# Altium PCB Driver Morpheus v7.0.PcbDoc
Units mm, origin at the board's own origin, x right, y up, seen from the top; angles counter-clockwise.
Board outline 39.62 x 39.62 mm, 2 copper layers (Top Layer, Bottom Layer); 50 components, 26 nets, 148 pads, 19 vias.
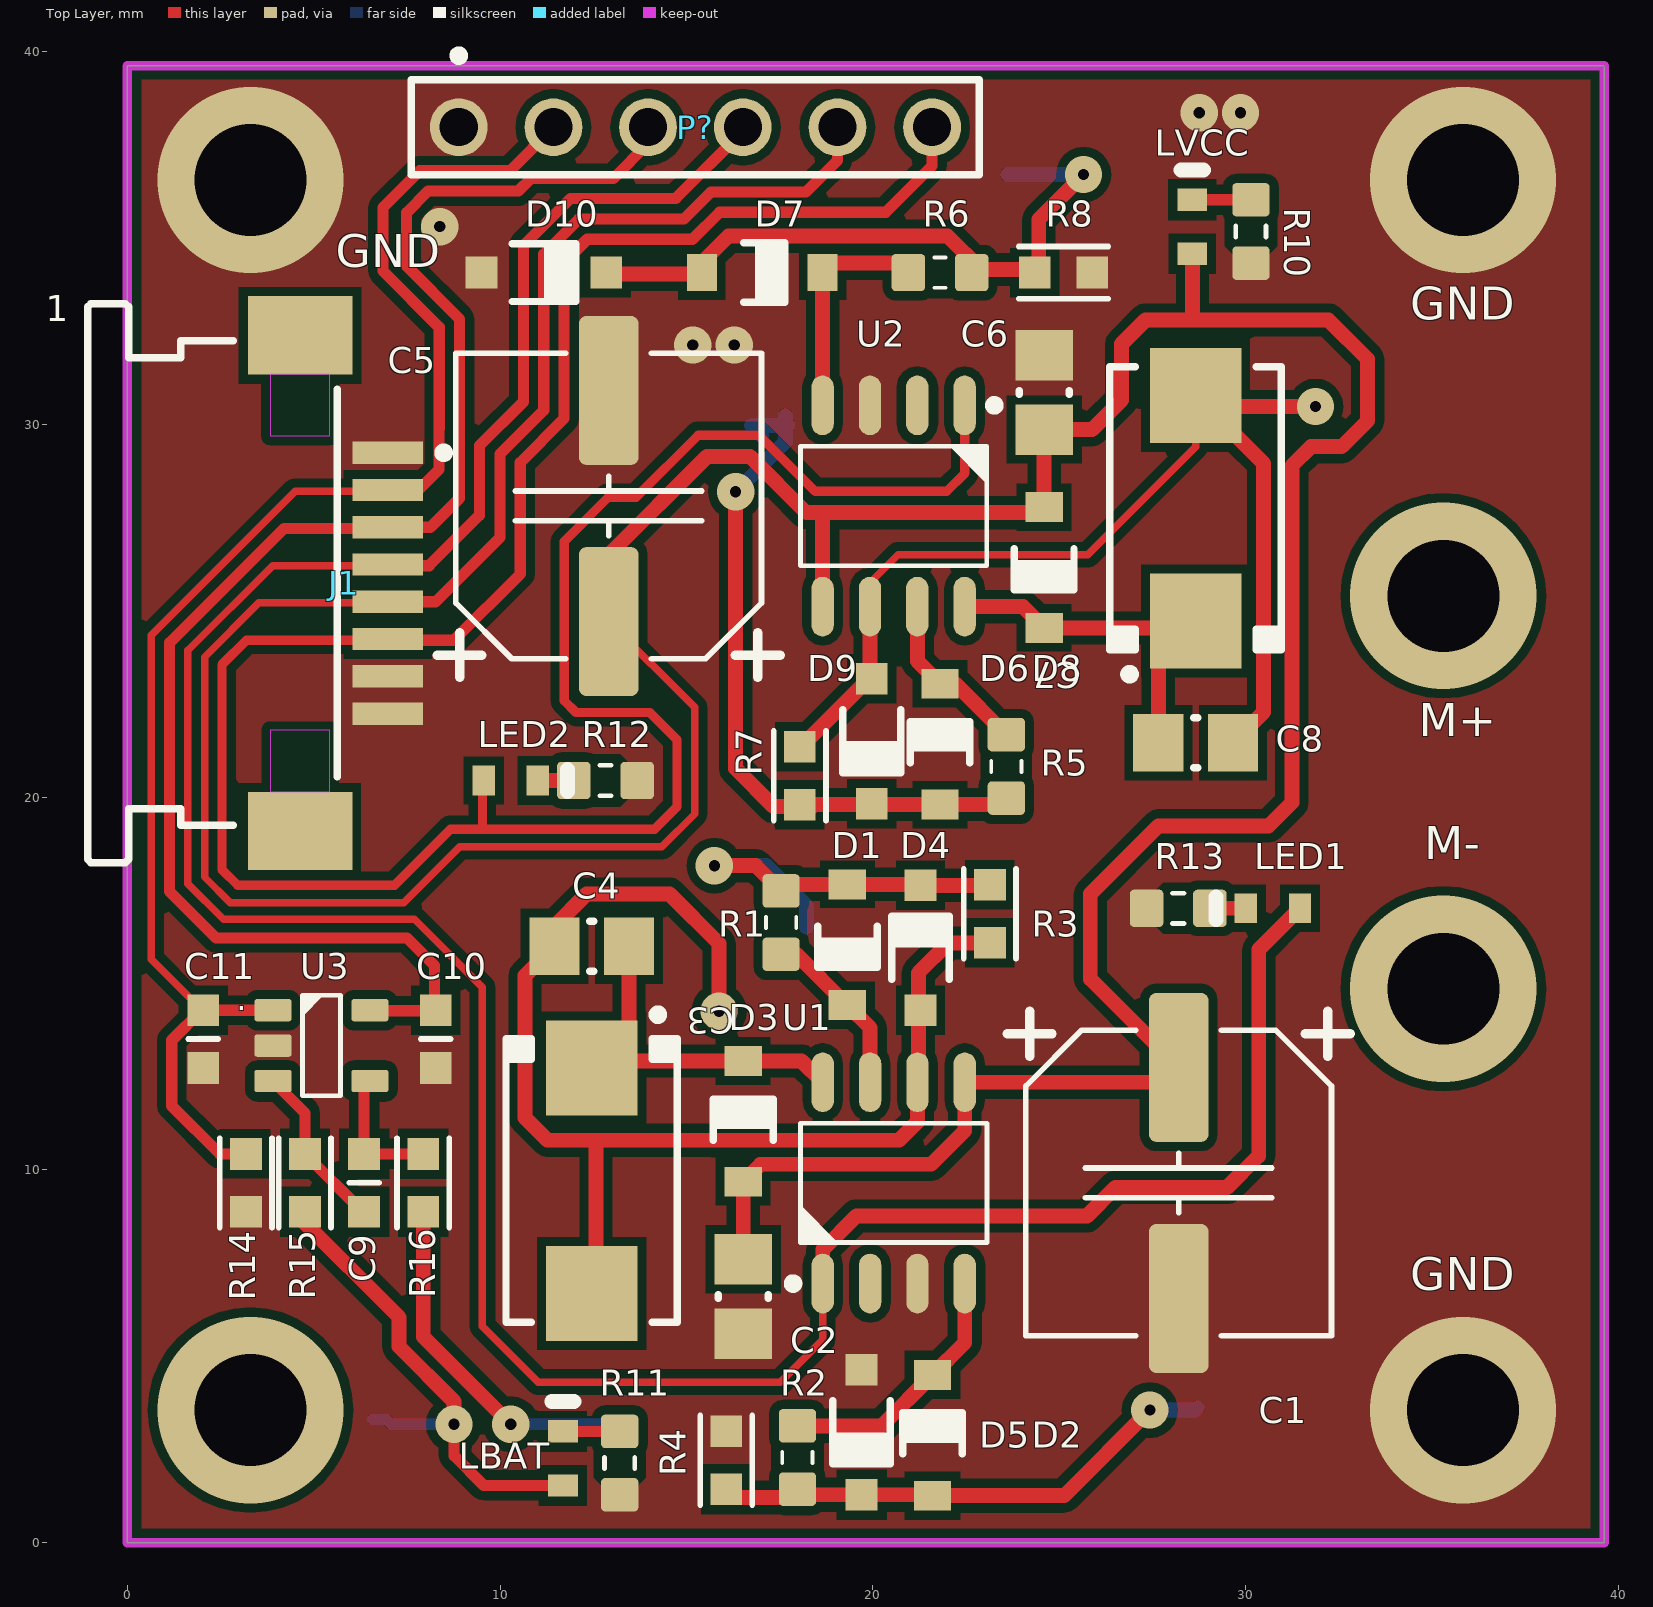
[diagram p0: Top Layer view]
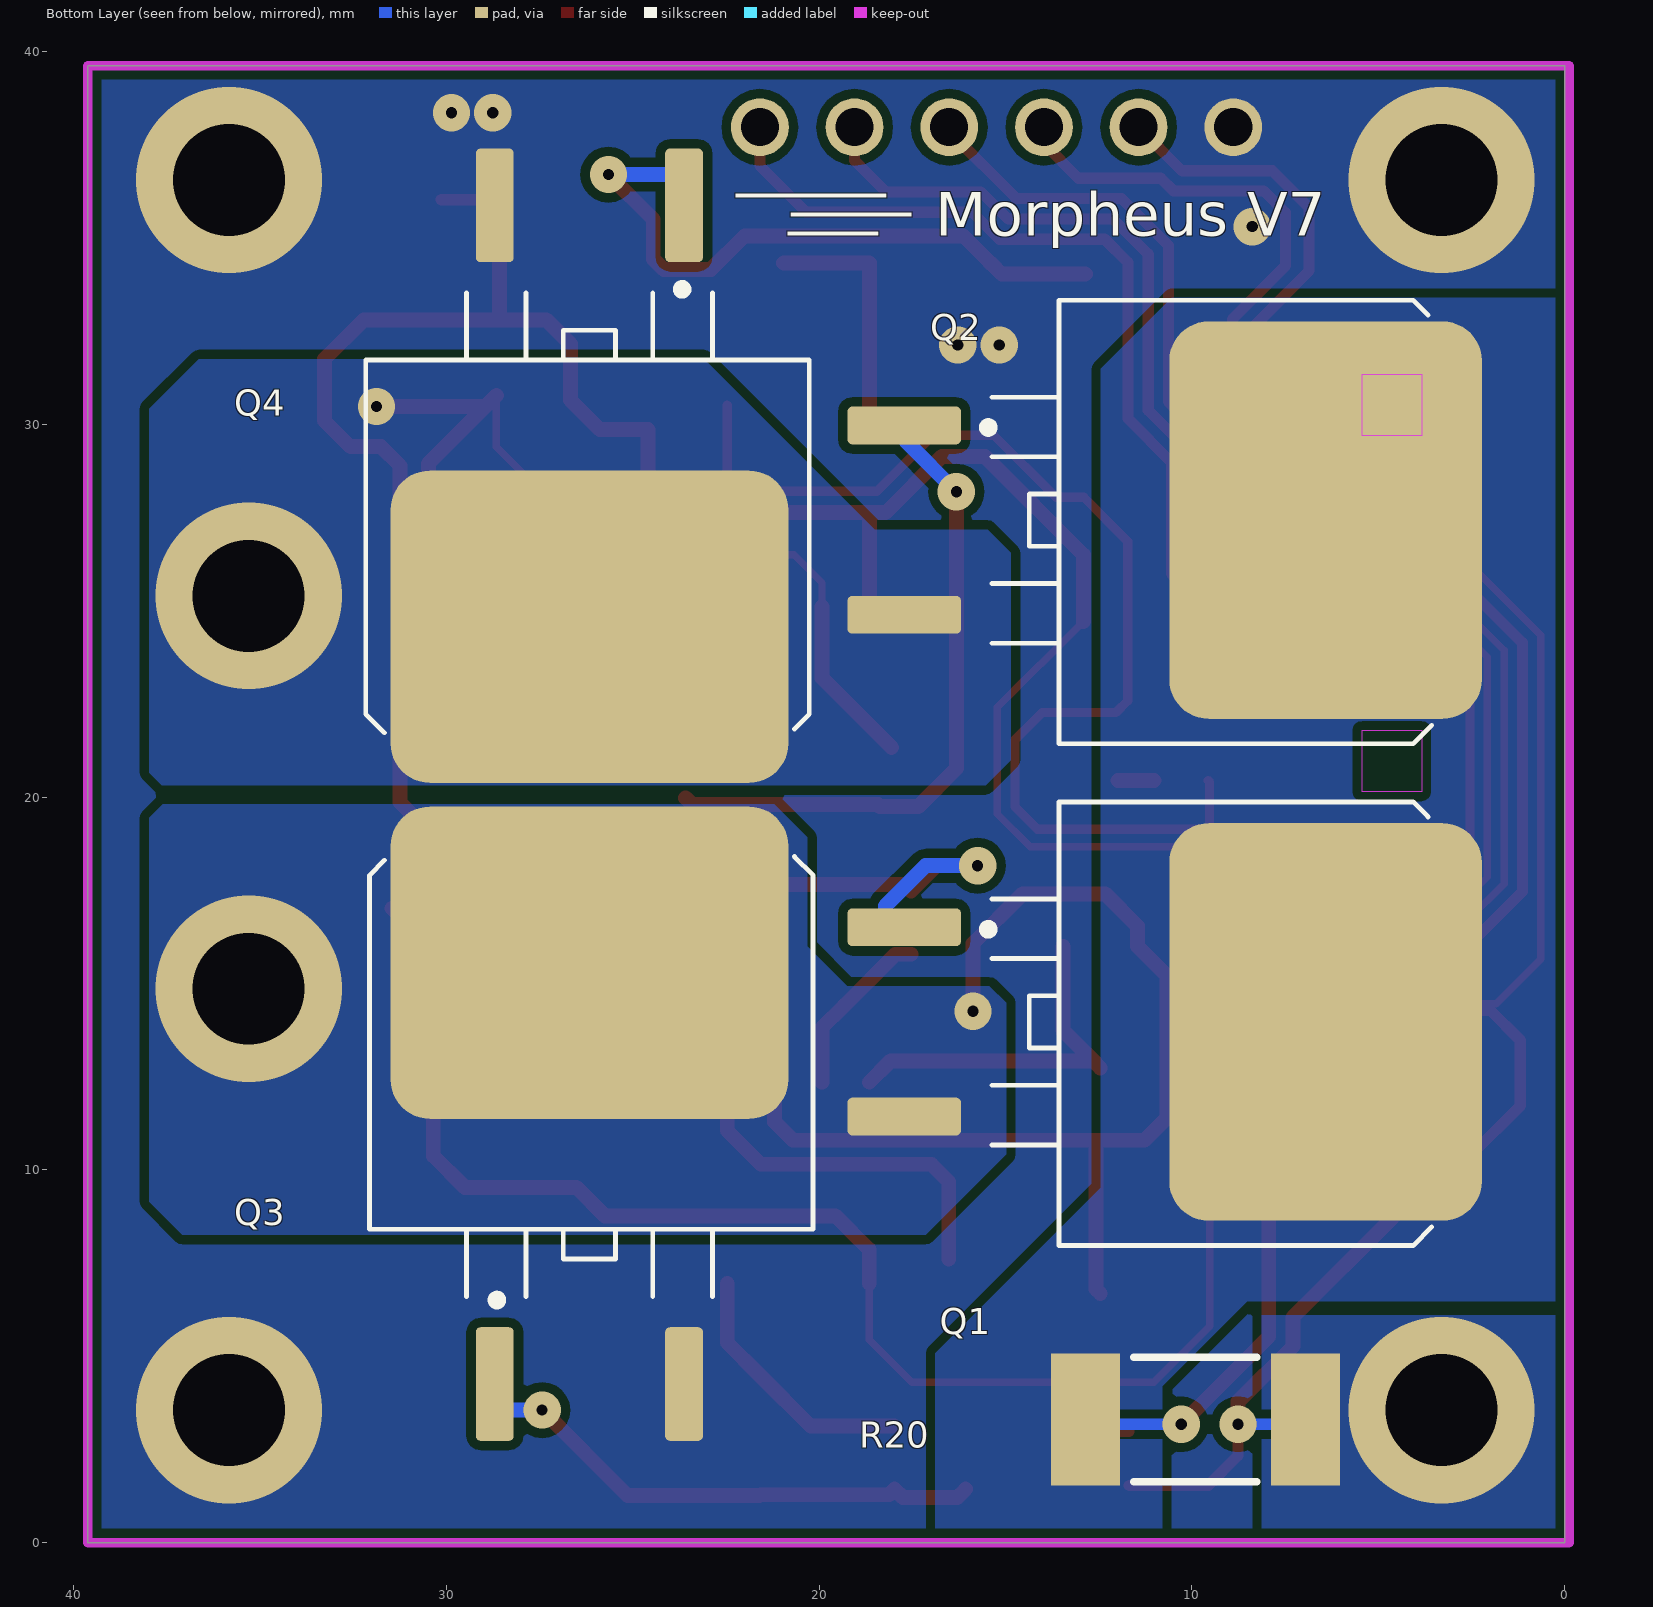
[diagram p1: Bottom Layer view, seen from below]
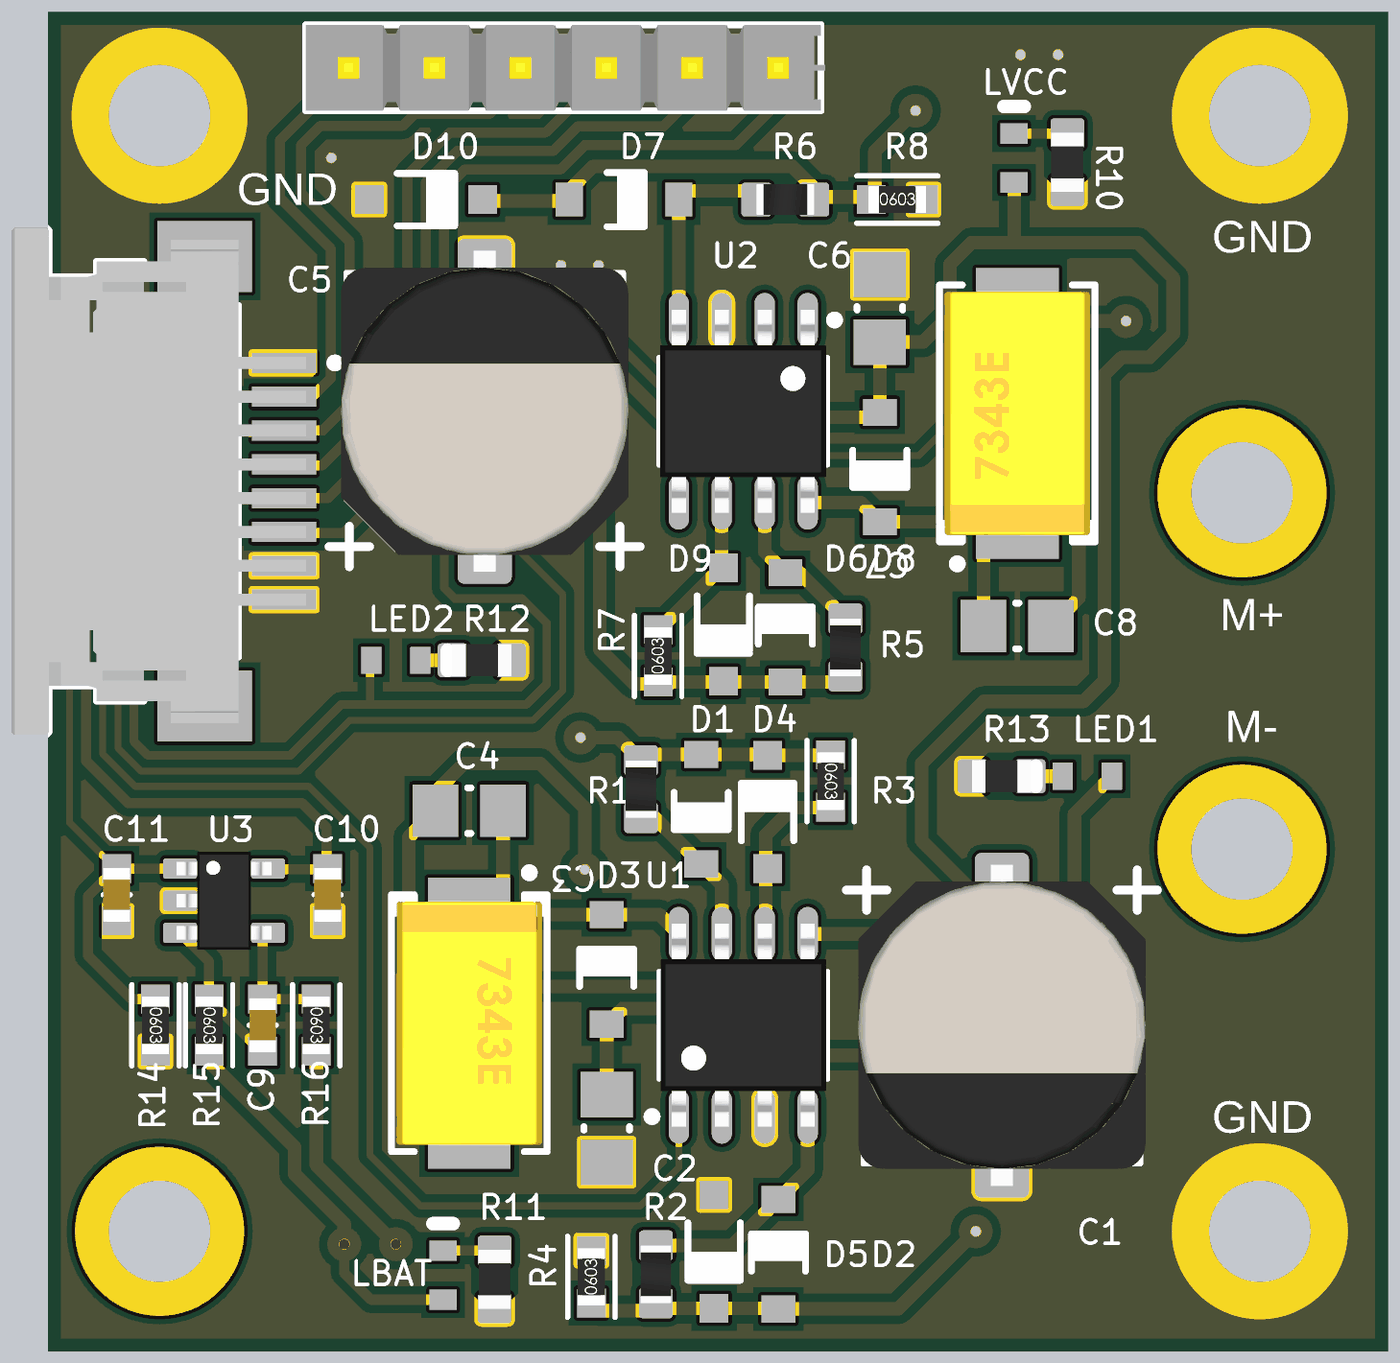
[diagram p2: 3D render of the assembled board from above, using the file's embedded part models]
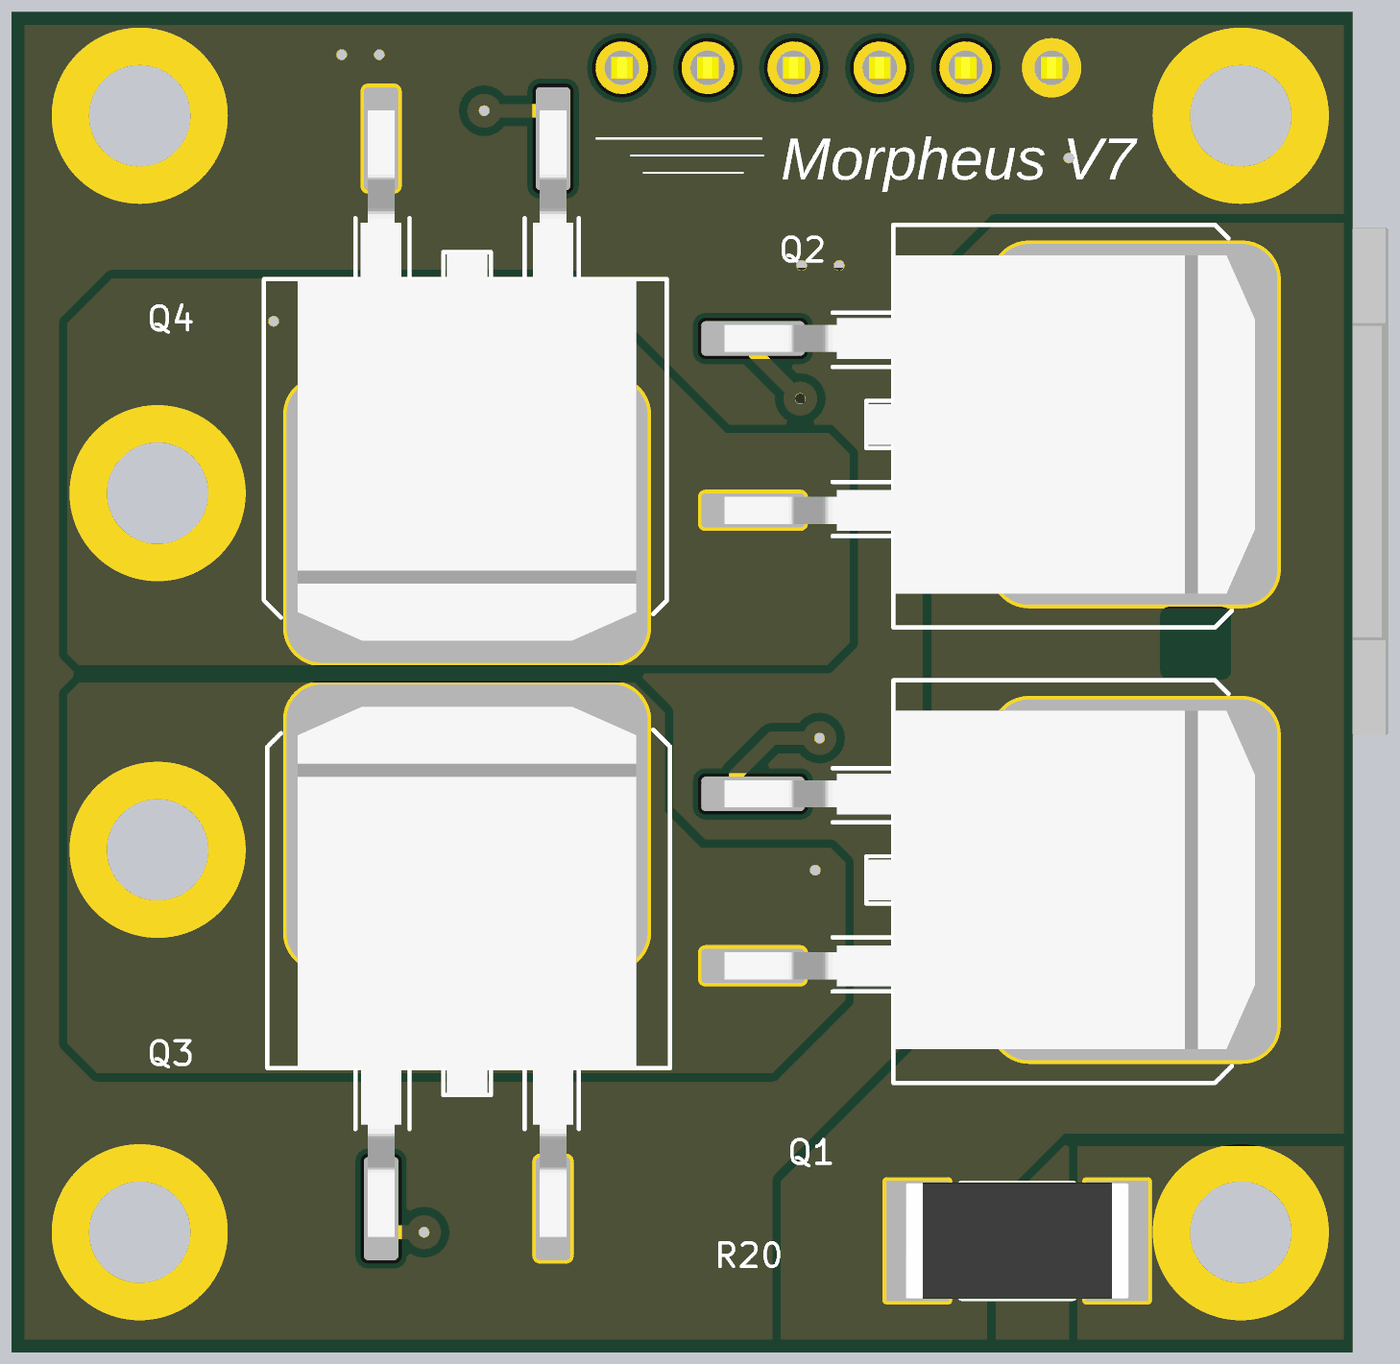
[diagram p3: 3D render of the assembled board from below, using the file's embedded part models]

## Layer stack, top to bottom
Top Solder: solder mask 0.0102, Solder Resist, Dk 3.5
Top Layer: signal copper 0.0356
Dielectric 1: dielectric 0.32, FR-4, Dk 4.8
Bottom Layer: signal copper 0.0356
Bottom Solder: solder mask 0.0102, Solder Resist, Dk 3.5

## Board outline
0,0 0,39.624 39.624,39.624 39.624,0

## Design rules (kind name [scope] priority, off if disabled: settings)
Clearance [All] p1: gap=0.245 ignorepadtopadclearanceinfootprint=TRUE
PlaneConnect [All] p1: planeconnectstyle=Direct reliefexpansion=0.508 reliefentries=4 reliefconductorwidth=0.254 reliefairgap=0.254
PolygonConnect [All] p1: connectstyle=Direct reliefconductorwidth=0.254 reliefentries=4 polygonreliefangle="90 Angle" airgapwidth=0.254
RoutingVias [All] p1: holewidth=0.711 width=1.27 viastyle="Through Hole" minholewidth=0.711 minwidth=7 maxholewidth=4 maxwidth=1.27
SolderMaskExpansion [All] p1: expansion=0.102
Width [All] p1: maxlimit=0.54 minlimit=0.1 preferedwidth=0.3
29 further rules are at their usual default settings.

## Classes and differential pairs
component class INA169: C9 C10 C11 R14 R15 R16 U3 U?
component class "Driver Morpheus V7.0": C1 C2 C3 C4 C5 C6 C7 C8 D1 D2 D3 D4 D5 D6 D7 D8 D9 D10 J1 LBAT LED1 LED2 LVCC P? Q1 Q2 Q3 Q4 R1 R2 R3 R4 R5 R6 R7 R8 R10 R11 R12 R13 R20 U1 U2

## Components (designator, comment, footprint, x,y, rotation, side; value= is the part's Value field where it differs from the comment)
C1 "100uF 25v" CAP_ELEC_SIZE_E 28.206,9.65 r180 top
C2 "CAP 100nF 25V 0805(2012)" CAPC0805(2012)145_M 16.522,6.602 r90 top value=100nF
C3 "Cap_10u_35v" "CAP POL 2917/7343" 12.458,9.713 r270 top
C4 "CAP 100nF 25V 0805(2012)" CAPC0805(2012)145_M 12.458,16 r0 top value=100nF
C5 "100uF 25v" CAP_ELEC_SIZE_E 12.913,27.811 r0 top
C6 "CAP 100nF 25V 0805(2012)" CAPC0805(2012)145_M 24.597,30.859 r270 top value=100nF
C7 "Cap_10u_35v" "CAP POL 2917/7343" 28.661,27.748 r90 top
C8 "CAP 100nF 25V 0805(2012)" CAPC0805(2012)145_M 28.661,21.461 r180 top value=100nF
C9 "0.10µF" SMD-0603C 6.349,9.652 r180 top
C10 "0.10µF" SMD-0603C 8.269,13.51 r0 top
C11 "0.10µF" SMD-0603C 2.032,13.51 r0 top
D1 "1N4148W" JSCJ-SOD-123-2_V 19.316,16.04 r270 top
D2 "1N4148W" JSCJ-SOD-123-2_V 21.602,2.879 r90 top
D3 "1N4148W" JSCJ-SOD-123-2_V 16.522,11.301 r90 top
D4 "MMSZ5248B-E3-08" VISH-SOD-123-2_V 21.278,15.96 r90 top
D5 "MMSZ5248B-E3-08" VISH-SOD-123-2_V 19.697,2.959 r270 top
D6 "1N4148W" JSCJ-SOD-123-2_V 21.803,21.421 r90 top
D7 "1N4148W" JSCJ-SOD-123-2_V 17.033,34.073 r0 top
D8 "1N4148W" JSCJ-SOD-123-2_V 24.597,26.16 r270 top
D9 "MMSZ5248B-E3-08" VISH-SOD-123-2_V 19.971,21.501 r270 top
D10 "MMSZ5248B-E3-08" VISH-SOD-123-2_V 11.176,34.073 r0 top
J1 "52271-0879" MOLX-52271-0879 5.81,25.741 r270 top
LBAT "TLMS1100-GS08" VISH-TLMX1100-2_V 11.684,2.259 r90 top
LED1 "TLMB1100-GS08" VISH-TLMX1100-2_V 30.734,17.018 r180 top
LED2 "TLMB1100-GS08" VISH-TLMX1100-2_V 10.287,20.447 r0 top
LVCC "TLMB1100-GS08" VISH-TLMX1100-2_V 28.567,35.302 r90 top
P? "TSW-106-07-S-S" SMTC-TSW-106-07-S-S_V 15.24,37.973 r0 top
Q1 "IRF3205S" D2PAK-3 12.065,13.97 r0 bottom
Q2 "IRF3205S" D2PAK-3 12.065,27.432 r0 bottom
Q3 "IRF3205S" D2PAK-3 26.162,9.906 r270 bottom
Q4 "IRF3205S" D2PAK-3 26.162,30.226 r90 bottom
R1 "22" 0603ESDA 17.538,16.635 r90 top
R2 "22" 0603ESDA 17.977,2.284 r270 top
R3 "RC0402JR-071KL" SMD-0603-RES 23.142,16.872 r180 top value=10K
R4 "RC0402JR-071KL" SMD-0603-RES 16.068,2.209 r0 top value=10K
R5 "22" 0603ESDA 23.581,20.826 r90 top
R6 "22" 0603ESDA 21.803,34.073 r180 top
R7 "RC0402JR-071KL" SMD-0603-RES 18.041,20.574 r0 top value=10K
R8 "RC0402JR-071KL" SMD-0603-RES 25.115,34.073 r270 top value=10K
R10 "Thick Film" RESC1608X55N 30.144,35.177 r270 top value=750R
R11 "Thick Film" RESC1608X55N 13.208,2.134 r270 top value=2k
R12 "Thick Film" RESC1608X55N 12.827,20.447 r0 top value=220R
R13 "Thick Film" RESC1608X55N 28.194,17.018 r180 top value=220R
R14 "RC0402JR-071KL" SMD-0603-RES 3.181,9.652 r180 top value=10K
R15 "RC0402JR-071KL" SMD-0603-RES 4.765,9.652 r180 top value=100R
R16 "RC0402JR-071KL" SMD-0603-RES 7.934,9.652 r180 top value=100R
R20 "71-WSLF25121L000FEA" RESC6432X89X76ML25T25 9.906,3.302 r180 bottom
U1 "IR2184" SOIC127P600X175-8AN 20.561,9.65 r90 top
U2 "IR2184" SOIC127P600X175-8AN 20.558,27.811 r270 top
U3 "INA169" SOT23-5 5.207,13.335 r0 top

## Footprints (in the part's own frame and the unit in brackets; to place one, negate y for a bottom-side part, rotate by r counter-clockwise, add the part's x,y. Pads: shape width x height; smd on the part's side, far side on the other; paste and mask are expansions set on the pad)
0603ESDA [mm] "Chip ESD suppressor, Body 1.6x0.8mm, 0603, IPC Medium Density"
  round 0.254 on Mech15: 0(0,0)
  rrect25% 0.9x1 smd: 1(-0.85,0) 2(0.85,0)
  Top Layer pour cut-out: -0.65,0.5 -0.45,0.7 0.45,0.7 0.65,0.5 0.65,-0.5 0.45,-0.7 -0.45,-0.7 -0.65,-0.5
  silkscreen extent -0.15,-0.41 0.15,0.41, body extent -0.85,-0.45 0.85,0.45, height 0.79
"CAP POL 2917/7343" [mm] "Molded Capacitor, 2-Leads, Body 7.30x4.30mm, IPC Medium Density"
  rect 2.55x2.45 smd: 1(-3.025,0) 2(3.025,0)
  silkscreen extent -4.57,-2.3 3.8,2.3, body extent -3.65,-2.15 3.65,2.15, height 4.1
CAP_ELEC_SIZE_E [mm] "Capacitor, polarized, aluminum can; 8.0x6.2mm DxH"
  round 0.635 on Mech15: 0(0,0)
  rrect25% 1.6x4 smd: 1(0,-3.1) 2(0,3.1)
  silkscreen extent -4.6,-4.6 4.6,4.1, body extent -4.25,-4.75 4.25,4.75, height 6.5
CAPC0805(2012)145_M [mm] "Chip Capacitor, Body 2.0x1.2mm, Height 1.45mm, IPC Low Density"
  rect 1.35x1.55 smd: 1(-1,0) 2(1,0)
  silkscreen extent -0.05,-0.67 0.05,0.67, body extent -1.1,-0.72 1.1,0.72, height 1.45
D2PAK-3 [mil] "D-PAK/TO-263-3; 3 Leads (1 Cropped); Body 14.7 (inc. leads) x 10.2 mm (LxW max)"
  round 20 on Mech15: 0(0,0)
  rrect25% 120x40 smd: 1(222.5,-100) 3(222.5,100)
  rrect25% 330x420 smd: 2(-222.5,0)
  silkscreen extent -335,-232 139,236, body extent -361,-197 256,197, height 189
JSCJ-SOD-123-2_V [mm] "SMD, 2-Leads, Body 2.7x1.6mm, Height 1.25mm"
  rect 0.8x1 smd: 1(-1.62,0) 2(1.62,0)
  silkscreen extent -0.5,-0.8 0.6,0.8, body extent -1.35,-0.8 1.35,0.8, height 1.25
MOLX-52271-0879 [mm] "FPC Connector, 8-Leads, Right Angle, Pitch 1.0 mm, Mated Height 3.0 mm, SMT"
  rect 0.6x1.9 smd: 1(-3.5,1.175) 2(-2.5,1.175) 3(-1.5,1.175) 4(-0.5,1.175) 5(0.5,1.175) 6(1.5,1.175) 7(2.5,1.175) 8(3.5,1.175)
  rect 2.1x2.8 smd: MP1(-6.65,-1.175) MP2(6.65,-1.175)
  Keep-Out Layer region: 3.95,-1.975 5.6,-1.975 5.6,-0.375 3.95,-0.375
  Keep-Out Layer region: -5.6,-1.975 -3.95,-1.975 -3.95,-0.375 -5.6,-0.375
  silkscreen extent -7.5,-6.87 7.5,2.8, body extent -7.5,-6.87 7.5,1.83, height 3.01
RESC1608X55N [mm] "Chip Resistor, Body 1.6x0.8mm, EIA 0603, IPC Medium Density"
  round 0.254 on Mech15: 0(0,0)
  rrect25% 0.9x1 smd: 1(-0.85,0) 2(0.85,0)
  Top Layer pour cut-out: -0.6,0.5 -0.4,0.7 0.4,0.7 0.6,0.5 0.6,-0.5 0.4,-0.7 -0.4,-0.7 -0.6,-0.5
  silkscreen extent -0.15,-0.41 0.15,0.41, body extent -0.87,-0.47 0.88,0.48, height 0.54
RESC6432X89X76ML25T25 [mm] "Chip Resistor, 2-Leads, Body 6.6x3.43mm, IPC Low Density"
  rect 1.85x3.55 smd: 1(-2.95,0) 2(2.95,0)
  silkscreen extent -1.65,-1.68 1.65,1.68, body extent -3.3,-1.71 3.3,1.71, height 0.89
SMD-0603-RES [mm]
  rect 0.85x0.85 smd: 1(0,0.775) 2(0,-0.775)
  silkscreen extent -0.7,-1.2 0.7,1.2, body extent -0.4,-0.85 0.4,0.85, height 0.56
SMD-0603C [mm]
  rect 0.85x0.85 smd: 1(0,0.775) 2(0,-0.775)
  silkscreen extent -0.4,0 0.4,0, body extent -0.4,-0.8 0.4,0.8, height 0.9
SMTC-TSW-106-07-S-S_V [mm] "Header, 6-Leads, Body 15.24x2.54mm, Pitch 2.54mm"
  round 1.55 hole 1.02: 1(-6.35,0) 2(-3.81,0) 3(-1.27,0) 4(1.27,0) 5(3.81,0) 6(6.35,0)
  silkscreen extent -7.62,-1.27 7.62,2.04, body extent -7.62,-1.27 7.75,1.27, height 8.38
SOIC127P600X175-8AN [mm] "SOIC, 8-Leads, Body 4.9x3.9mm, Pitch 1.27mm, IPC Medium Density"
  round 1 on Mech15: 0(0,0)
  oval 1.6x0.6 smd: 1(-2.7,1.905) 2(-2.7,0.635) 3(-2.7,-0.635) 4(-2.7,-1.905) 5(2.7,-1.905) 6(2.7,-0.635) 7(2.7,0.635) 8(2.7,1.905)
  silkscreen extent -2.82,-2.5 1.6,2.82, body extent -3,-2.45 3,2.45, height 1.75
SOT23-5 [mm]
  round 0.5 on Mech15: 0(0,0)
  rrect25% 1x0.6 smd: 1(-1.3,0.95) 2(-1.3,0) 3(-1.3,-0.95) 4(1.3,-0.95) 5(1.3,0.95)
  silkscreen extent -0.51,-1.35 0.51,1.35, body extent -1.4,-1.45 1.4,1.45, height 1.44
VISH-SOD-123-2_V [mm] "SMD, 2-Leads, Body 2.7x1.55mm, Height 1.35mm"
  rect 0.85x0.85 smd: 1(-1.675,0) 2(1.675,0)
  silkscreen extent -0.85,-0.77 0.85,0.78, body extent -1.35,-0.77 1.35,0.77, height 1.35
VISH-TLMX1100-2_V [mm] "SMD, 2-Leads, Body 1.6x0.8mm"
  rect 0.6x0.8 smd: 1(-0.725,0) 2(0.725,0)
  silkscreen extent 1.53,-0.3 1.53,0.3, body extent -0.8,-0.4 0.8,0.4, height 0.65

## Part data
C1: library part Cap_10u_35v
C2 C4 C6 C8: library part CMP-1036-04408-1, "CAP 100nF 25V ±5% 0805 (2012 Metric) Thickness 1.45mm SMD", Case-EIA=0805, Case-Metric=2012, Rated Voltage="25 V", Tolerance=±5%, Max Thickness="1.45 mm", Technology=SMT
C5: library part Cap_100u_25v, "Cap Tântalo"
C9 C10 C11: library part GCJ188R71C104KA01D, "CAP CER 0.1UF 16V X7R 0603", Digi-Key Part Number=490-5796-1-ND, Manufacturer="Murata Electronics North America", Operating Temperature="-55°C ~ 125°C", Package / Case="0603 (1608 Metric)", Ratings=AEC-Q200, Temperature Coefficient=X7R, Tolerance=±10%, Voltage=16V, @ qty=0, Applications="Automotive, Boardflex Sensitive", Datasheets=http://www.murata.com/~/media/webrenewal/support/library/catalog/products/capacitor/mlcc/c03e.ashx, Factory Stock=0, Features="Soft Termination", Height - Seated (Max)=-, Image=//media.digikey.com/Renders/Murata%20Renders/0603%28LQG18%29.jpg, Lead Spacing=-, Lead Style=-, Minimum Quantity=1, Mounting Type="Surface Mount, MLCC", Packaging="Cut Tape (CT)", Part Number=GCJ188R71C104KA01D, Part Status=Active, Quantity Available=22473, Series=GCJ, Size / Dimension="0.063\" L x 0.031\" W (1.60mm x 0.80mm)", Thickness (Max)="0.035\" (0.90mm)", Unit Price (USD)=0.21
D1 D2 D3 D6 D7 D8: library part CMP-0914-00001-1, "Fast Switching Diode, 75 V, 150 mA, 2-Pin 2.7 x 1.6 x 1.25 mm SMD, Tape and Reel", Manufacturer="Changjiang Electronics", ComponentLink1Description="Manufacturer URL", ComponentLink1URL=http://www.cj-elec.com/, ComponentLink2Description=Datasheet, ComponentLink2URL=http://www.cj-elec.com/txUpfile/20121613352740313.pdf, ComponentLink3Description="Package Specification", ComponentLink3URL=http://www.cj-elec.com/txUpfile/201412112231195145.pdf, DatasheetVersion="Rev. A", IO (mA)=150, IR (uA)=1, Mounting Technology="Surface Mount", PackageDescription="2-Pin SMD, Body 2.7 x 1.6 mm, Height 1.25 mm", PackageReference=SOD-123-2, PackageVersion="Rev. A", Packing="Tape and Reel", PartNumber=1N4148W, PD (mW)=350, Trr (ns)=4, TSTG (degC)="-55 to 150", VF (V)=1.25, VR (V)=75
D4 D5 D9 D10: library part CMP-0931-00036-1, "Small Signal Zener Diode, 18 V +/- 5%, -55 to 155 degC, 2-Pin SOD-123, RoHS, Tape and Reel", Manufacturer="Vishay Semiconductor", Operating Temperature="-55 to 150 degC", Power Dissipation (mW)=500, Test Current (IZT1) (mA)=7, Tolerance="+/- 5%", Zener Voltage (NOM.) (V)=18, ComponentLink1Description="Manufacturer URL", ComponentLink1URL=http://www.vishay.com/, ComponentLink2Description=Datasheet, ComponentLink2URL=http://www.vishay.com/docs/85774/mmsz5225.pdf, ComponentLink3Description="Package Specification", ComponentLink3URL=http://www.vishay.com/docs/85774/mmsz5225.pdf, DatasheetVersion="Rev. 1.9", Int. Construction=Single, Mounting Technology="Surface Mount", PackageDescription="2-Pin SMD, Body 2.7 x 1.55 mm, Height 1.35 mm", PackageReference=SOD-123-2, PackageVersion="Rev. 1.9", Packing="Tape and Reel", PartNumber=MMSZ5248B-E3-08, RoHS=TRUE, Zener Impedance (IZT1) (Max.) (Ohm)=21
J1: library part CMP-1241-00231-1, "1.0 mm Pitch Easy-On(TM) Type FPC Connector, 3.0 mm Mated Height, Right Angle, ZIF, SMT, Bottom Contact, 8 Circuits, -40 to 85 degC, ELV and RoHS Compliant, Tape and Reel", Current (Max per Contact)=0.5A, Manufacturer=Molex, Voltage (Max)="50V AC (RMS)/DC", Circuits (Loaded)=8, ComponentLink1Description="Manufacturer URL", ComponentLink1URL=http://www.molex.com/molex/index.jsp, ComponentLink2Description=Datasheet, ComponentLink2URL=http://www.molex.com/webdocs/datasheets/pdf/en-us/0522710879_FFC_FPC_CONNECTORS.pdf, ComponentLink3Description="Package Specification", ComponentLink3URL=http://www.molex.com/pdm_docs/sd/522710879_sd.pdf, Contact Position=Bottom, Durability (mating cycles max)=30, Entry Angle="90degrees Angle", Mated Height=3.00mm, Material - Metal="Phosphor Bronze", Material - Plating Mating=Tin-Bismuth, Material - Plating Termination=Tin-Bismuth, Mounting Technology="Surface Mount", Number of Rows=1, Orientation="Right Angle", PackageDescription="8-Lead FPC Connector, Pitch 1.0 mm", PackageReference=52271-0879, PackageVersion="Rev. B, 04/2004", Packing="Tape and Reel", PartNumber=52271-0879, PCB Locator=No, PCB Retention=Yes, Pitch - Mating Interface=1.00mm, Pitch - Termination Interface=1.00mm, Polarized to PCB=Yes, RoHS=TRUE, Stackable=No
LBAT: library part CMP-1666-00028-1, "Red LED, 10 mA, 2.0 V, -40 to 100 degC, 2-Pin SMD (0603), RoHS, Tape and Reel / (https://br.mouser.com/datasheet/2/427/tlmb1100-279843.pdf)", Capacitance="10 nF", Case\Package=Radial, Max Operating Temperature="125 degC", Min Operating Temperature="-55 degC", Package Quantity=500, Tolerance=10%, Type (Capacitors)=X7R, Voltage Rating="100 V", ComponentLink1Description="Manufacturer URL", ComponentLink1URL=http://www.vishay.com/, ComponentLink2Description=Datasheet, ComponentLink2URL=http://download.siliconexpert.com/pdfs/2016/8/7/12/43/26/667/vsh_/manual/379263299541529tlmb1100.pdf, DatasheetVersion="Rev. 2.7, 03/2016", Height="2.54 mm", Lead Pitch="2.54 mm", Length="5.33 mm", Mount="Through Hole", PackageDescription="2-Pin Surface Mount Device, Body 1.6 x 0.8 mm", PackageReference=0603, Packaging=Bulk, Pins=2, Radiation Hardening=No, REACH SVHC="No SVHC", RoHSCompliant=true, Width="3.81 mm"
LED1 LED2: library part CMP-1666-00028-1, "Blue LED, 10 mA, 3.9 V, -40 to 100 degC, 2-Pin SMD (0603), RoHS, Tape and Reel", Capacitance="10 nF", Case\Package=Radial, Max Operating Temperature="125 degC", Min Operating Temperature="-55 degC", Package Quantity=500, Tolerance=10%, Type (Capacitors)=X7R, Voltage Rating="100 V", ComponentLink1Description="Manufacturer URL", ComponentLink1URL=http://www.vishay.com/, ComponentLink2Description=Datasheet, ComponentLink2URL=http://download.siliconexpert.com/pdfs/2016/8/7/12/43/26/667/vsh_/manual/379263299541529tlmb1100.pdf, DatasheetVersion="Rev. 2.7, 03/2016", Height="2.54 mm", Lead Pitch="2.54 mm", Length="5.33 mm", Mount="Through Hole", PackageDescription="2-Pin Surface Mount Device, Body 1.6 x 0.8 mm", PackageReference=0603, Packaging=Bulk, Pins=2, Radiation Hardening=No, REACH SVHC="No SVHC", RoHSCompliant=true, Width="3.81 mm"
LVCC: library part CMP-1666-00028-1, "Blue LED, 15 mA, 3.9 V, -40 to 100 degC, 2-Pin SMD (0603), RoHS, Tape and Reel / (https://br.mouser.com/datasheet/2/427/tlmb1100-279843.pdf)", Capacitance="10 nF", Case\Package=Radial, Max Operating Temperature="125 degC", Min Operating Temperature="-55 degC", Package Quantity=500, Tolerance=10%, Type (Capacitors)=X7R, Voltage Rating="100 V", ComponentLink1Description="Manufacturer URL", ComponentLink1URL=http://www.vishay.com/, ComponentLink2Description=Datasheet, ComponentLink2URL=http://download.siliconexpert.com/pdfs/2016/8/7/12/43/26/667/vsh_/manual/379263299541529tlmb1100.pdf, DatasheetVersion="Rev. 2.7, 03/2016", Height="2.54 mm", Lead Pitch="2.54 mm", Length="5.33 mm", Mount="Through Hole", PackageDescription="2-Pin Surface Mount Device, Body 1.6 x 0.8 mm", PackageReference=0603, Packaging=Bulk, Pins=2, Radiation Hardening=No, REACH SVHC="No SVHC", RoHSCompliant=true, Width="3.81 mm"
P?: library part CMP-1681-00007-1, "Male Header, Pitch 2.54 mm, 1 x 6 Position, Height 8.38 mm, Tail Length 2.54 mm, -55 to 125 degC, RoHS, Bulk", Colour=Black, Max Operating Temperature="125 degC", Min Operating Temperature="-55 degC", Package Quantity=1, Contact Finish=Gold, Contact Material=Bronze, Contact Plating=Gold, DatasheetVersion=12/2015, Height="8.38 mm", Lead Pitch="0.1 inch", Length="15.24 mm", Mount="Through Hole", Mounting Technology="Through Hole", PackageDescription="Male Header, Pitch 2.54 mm, 1 x 6 Position, Height 8.38 mm, Tail Length 2.54 mm", PackageReference=TSW-102-07-S-S, Packaging=Bulk, Pins=6, RoHSCompliant=true, Rows=1
Q1 Q2 Q3 Q4: "HEXFET Power MOSFET", ComponentLink1Description="Manufacturer Link", ComponentLink1URL=http://www.irf.com/, ComponentLink2Description=Datasheet, ComponentLink2URL=http://www.irf.com/product-info/datasheets/data/irf3205s.pdf, DatasheetVersion=Aug-1997, LatestRevisionDate=20-Nov-2009, LatestRevisionNote="IPC-7351 Footprint Added.", PackageDescription="3-Pin Transistor Outline Package 2.54 mm Pitch, 15.1 mm Lead Span", PackageReference=D2PAK, Published=8-Jun-2000, Publisher="Altium Limited"
R1 R2 R5 R6: library part ERJ-3EKF22R0V, "RES SMD 22 OHM 1% 1/10W 0603", Digi-Key Part Number=P22.0HCT-ND, Manufacturer="Panasonic Electronic Components", Operating Temperature="-55°C ~ 155°C", Package / Case="0603 (1608 Metric)", Power (Watts)="0.1W, 1/10W", Supplier Device Package=0603, Temperature Coefficient=±100ppm/°C, Tolerance=±1%, @ qty=1500, Composition="Thick Film", Datasheets=http://industrial.panasonic.com/www-cgi/jvcr13pz.cgi?E+PZ+3+AOA0002+ERJ3EKF22R0V+7+WW, Factory Stock=0, Failure Rate=-, Features="Automotive AEC-Q200", Height - Seated (Max)="0.022\" (0.55mm)", Image=//media.digikey.com/Photos/Panasonic%20Photos/MFG_ERJ-P6W%20Series.jpg, Minimum Quantity=1, Number of Terminations=2, Packaging="Cut Tape (CT)", Part Number=ERJ-3EKF22R0V, Part Status=Active, Quantity Available=100321, Series=ERJ, Size / Dimension="0.063\" L x 0.031\" W (1.60mm x 0.80mm)", Unit Price (USD)=0.00379
R3 R4 R7 R8 R14 R15 R16: library part "RES 1K 0402", "RES SMD 10K OHM 5% 1/16W 0402"
R10: library part RES_220R_0603_5%, "Resistor SMD chip 750 Ohm 1/16W 5% 0603", Manufacturer 1=Yageo, Manufacturer 2="Panasonic Electronic Components", Manufacturer 3="Stackpole Electronics Inc", Manufacturer 4="Rohm Semiconductor", Manufacturer 5="Royal Ohm", Manufacturer Part Number 1=RC0603JR-07220RL, Manufacturer Part Number 2=ERJ-3GEYJ221V, Manufacturer Part Number 3=RMCF0603JT220R, Manufacturer Part Number 4=MCR03ERTJ221, Manufacturer Part Number 5=0603WAJ0221, Package / Case="0603 (1608 metric)", Ratings="1/10 W", Supplier Part Number 1=311-220GRCT-ND, Tolerance=±5%, ComponentLink1Description=http://www.yageo.com/documents/recent/PYu-RC0603_51_RoHS_L_4.pdf, ComponentLink1URL=http://www.yageo.com/documents/recent/PYu-RC0603_51_RoHS_L_4.pdf, ComponentLink2Description=http://industrial.panasonic.com/www-cgi/jvcr13pz.cgi?E+PZ+3+AOA0001+ERJ3GEYJ221V+7+WW, ComponentLink2URL=http://industrial.panasonic.com/www-cgi/jvcr13pz.cgi?E+PZ+3+AOA0001+ERJ3GEYJ221V+7+WW, ComponentLink3Description=http://www.seielect.com/Catalog/SEI-RMCF_RMCP.pdf, ComponentLink3URL=http://www.seielect.com/Catalog/SEI-RMCF_RMCP.pdf, ComponentLink4Description=http://rohmfs.rohm.com/en/products/databook/datasheet/passive/resistor/chip_resistor/mcr_g.pdf, ComponentLink4URL=http://rohmfs.rohm.com/en/products/databook/datasheet/passive/resistor/chip_resistor/mcr_g.pdf, Material="Thick Film", RoHS 1="RoHS Compliant", RoHS 2="RoHS Compliant", RoHS 3="RoHS Compliant", RoHS 4="RoHS Compliant", SCDType=spec, Supplier 1=Digi-Key, Supplier 2=Digi-Key, Supplier 3=Digi-Key, Supplier 4=Digi-Key, Supplier Part Number 2=P220GCT-ND, Supplier Part Number 3=RMCF0603JT220RCT-ND, Supplier Part Number 4=RHM220CGCT-ND
R11: library part RES_220R_0603_5%, "Resistor SMD chip 2k Ohm 1/16W 5% 0603", Manufacturer 1=Yageo, Manufacturer 2="Panasonic Electronic Components", Manufacturer 3="Stackpole Electronics Inc", Manufacturer 4="Rohm Semiconductor", Manufacturer 5="Royal Ohm", Manufacturer Part Number 1=RC0603JR-07220RL, Manufacturer Part Number 2=ERJ-3GEYJ221V, Manufacturer Part Number 3=RMCF0603JT220R, Manufacturer Part Number 4=MCR03ERTJ221, Manufacturer Part Number 5=0603WAJ0221, Package / Case="0603 (1608 metric)", Ratings="1/10 W", Supplier Part Number 1=311-220GRCT-ND, Tolerance=±5%, ComponentLink1Description=http://www.yageo.com/documents/recent/PYu-RC0603_51_RoHS_L_4.pdf, ComponentLink1URL=http://www.yageo.com/documents/recent/PYu-RC0603_51_RoHS_L_4.pdf, ComponentLink2Description=http://industrial.panasonic.com/www-cgi/jvcr13pz.cgi?E+PZ+3+AOA0001+ERJ3GEYJ221V+7+WW, ComponentLink2URL=http://industrial.panasonic.com/www-cgi/jvcr13pz.cgi?E+PZ+3+AOA0001+ERJ3GEYJ221V+7+WW, ComponentLink3Description=http://www.seielect.com/Catalog/SEI-RMCF_RMCP.pdf, ComponentLink3URL=http://www.seielect.com/Catalog/SEI-RMCF_RMCP.pdf, ComponentLink4Description=http://rohmfs.rohm.com/en/products/databook/datasheet/passive/resistor/chip_resistor/mcr_g.pdf, ComponentLink4URL=http://rohmfs.rohm.com/en/products/databook/datasheet/passive/resistor/chip_resistor/mcr_g.pdf, Material="Thick Film", RoHS 1="RoHS Compliant", RoHS 2="RoHS Compliant", RoHS 3="RoHS Compliant", RoHS 4="RoHS Compliant", SCDType=spec, Supplier 1=Digi-Key, Supplier 2=Digi-Key, Supplier 3=Digi-Key, Supplier 4=Digi-Key, Supplier Part Number 2=P220GCT-ND, Supplier Part Number 3=RMCF0603JT220RCT-ND, Supplier Part Number 4=RHM220CGCT-ND
R12 R13: library part RES_220R_0603_5%, "Resistor SMD chip 220 Ohm 0.1W 5% 0603", Manufacturer 1=Yageo, Manufacturer 2="Panasonic Electronic Components", Manufacturer 3="Stackpole Electronics Inc", Manufacturer 4="Rohm Semiconductor", Manufacturer 5="Royal Ohm", Manufacturer Part Number 1=RC0603JR-07220RL, Manufacturer Part Number 2=ERJ-3GEYJ221V, Manufacturer Part Number 3=RMCF0603JT220R, Manufacturer Part Number 4=MCR03ERTJ221, Manufacturer Part Number 5=0603WAJ0221, Package / Case="0603 (1608 metric)", Ratings="1/10 W", Supplier Part Number 1=311-220GRCT-ND, Tolerance=±5%, ComponentLink1Description=http://www.yageo.com/documents/recent/PYu-RC0603_51_RoHS_L_4.pdf, ComponentLink1URL=http://www.yageo.com/documents/recent/PYu-RC0603_51_RoHS_L_4.pdf, ComponentLink2Description=http://industrial.panasonic.com/www-cgi/jvcr13pz.cgi?E+PZ+3+AOA0001+ERJ3GEYJ221V+7+WW, ComponentLink2URL=http://industrial.panasonic.com/www-cgi/jvcr13pz.cgi?E+PZ+3+AOA0001+ERJ3GEYJ221V+7+WW, ComponentLink3Description=http://www.seielect.com/Catalog/SEI-RMCF_RMCP.pdf, ComponentLink3URL=http://www.seielect.com/Catalog/SEI-RMCF_RMCP.pdf, ComponentLink4Description=http://rohmfs.rohm.com/en/products/databook/datasheet/passive/resistor/chip_resistor/mcr_g.pdf, ComponentLink4URL=http://rohmfs.rohm.com/en/products/databook/datasheet/passive/resistor/chip_resistor/mcr_g.pdf, Material="Thick Film", RoHS 1="RoHS Compliant", RoHS 2="RoHS Compliant", RoHS 3="RoHS Compliant", RoHS 4="RoHS Compliant", SCDType=spec, Supplier 1=Digi-Key, Supplier 2=Digi-Key, Supplier 3=Digi-Key, Supplier 4=Digi-Key, Supplier Part Number 2=P220GCT-ND, Supplier Part Number 3=RMCF0603JT220RCT-ND, Supplier Part Number 4=RHM220CGCT-ND
R20: library part CMP-2000-07419-1, "Chip Resistor, 1 mOhm, +/- 1%, 6 W, -65 to 170 degC, 2512 (6432 Metric), RoHS, Tape and Reel                        71-WSLF25121L000FEA", Case Code - in=2512, Case Code - mm=6432, Case Height=0.635mm, Case Length=6.4mm, Case Width=3.2mm, Manufacturer=Vishay, Operating Temperature Range=-65Cto+170C, Package / Case=2512(6432metric), Package Description="2-Pin Surface Mount Device, Body 6.35 x 3.18 mm", Power Rating=6W, Resistance=0.009Ohms, Temperature Coefficient=75PPM/C, Tolerance=1%, Brand=Vishay/Dale, Datasheet URL=http://www.vishay.com/docs/30100/wsl.pdf, Datasheet Version=07/2016, Factory Pack Quantity=2000, Manufacturer URL=http://www.vishay.com/, Mounting Technology=SurfaceMount, Package Reference=2512, Packaging=Reel, Product=MetalElementCurrentSensingResistors, Product Category=CurrentSenseResistors-SMD, RoHS=Details, Series=WSL, Termination Style=SMD/SMT, Type=PowerMetalStripResistors,LowValue(downto0.0005Ohms),SurfaceMount
U1 U2: PSpiceTemplate="X^@REFDES %VCC %IN %SD %COM %VB %HO %VS %LO @MODEL PARAMS:  ?CDELAY|CDELAY=@CDELAY||CDELAY=50N| ?RDELAY|RDELAY=@RDELAY||RDELAY=50| ?T1|T1=@T1||T1=-40| ?T2|T2=@T2||T2=25| ?T3|T3=@T3||T3=125| ?V1|V1=@V1||V1=10| ?V2|V2=@V2||V2=15| ?V3|V3=@V3||V3=20| ?TOFFT1|TOFFT1=@TOFFT1||TOFFT1=270N| ?TOFFT2|TOFFT2=@TOFFT2||TOFFT2=270N| ?TOFFT3|TOFFT3=@TOFFT3||TOFFT3=270N| ?TOFFV1|TOFFV1=@TOFFV1||TOFFV1=270N| ?TOFFV2|TOFFV2=@TOFFV2||TOFFV2=270N| ?TOFFV3|TOFFV3=@TOFFV3||TOFFV3=270N| ?TONT1|TONT1=@TONT1||TONT1=210N| ?TONT2|TONT2=@TONT2||TONT2=210N| ?TONT3|TONT3=@TONT3||TONT3=210N| ?TONV1|TONV1=@TONV1||TONV1=210N| ?TONV2|TONV2=@TONV2||TONV2=210N| ?TONV3|TONV3=@TONV3||TONV3=210N|", CDELAY=50N, RDELAY=50, T1=-40, T2=25, T3=125, TOFFT1=270N, TOFFT2=270N, TOFFT3=270N, TOFFV1=270N, TOFFV2=270N, TOFFV3=270N, TONT1=210N, TONT2=210N, TONT3=210N, TONV1=210N, TONV2=210N, TONV3=210N, V1=10, V2=15, V3=20
U3: Package=SOT23-5, Availability=Unavailable, DeviceSetName=INA169, GateName_1=G$1, LibraryName=INA169, MF="Texas Instruments", MP=INA169, Price=None, SymbolName_1=INA169

## Via types
v1: diameter 1, hole 0.3, Top Layer to Bottom Layer, tented both sides, 13 vias
v2: diameter 5, hole 3, Top Layer to Bottom Layer, 6 vias

## Nets (pads, with @x,y where several pads share a name; then routed paths per layer and width w, separated by ;. In a path a pad name is that pad's centre, name@x,y a point inside that pad or via, vN(x,y) a via of type N, cw(c..) or ccw(c..) an arc to the next point about the centre after c; other vN are vias at no path point)
+3.3v: C10.1 J1.3 P?.3 U3.5 | length 42.9
  Top Layer w0.3: U3.5@6.507,14.267 C10.1@8.239,14.267 ; C10.1@8.269,14.237 C10.1@8.239,14.267 ; P?.3 13.97,37.531 13.042,36.603 10.831,36.603 10.486,36.258 8.068,36.258 7.487,35.677 7.487,34.256 8.912,32.831 8.912,29.663 8.906,29.657 8.906,28.019 8.128,27.241 J1.3 6.954,27.21 4.2,27.21 1.13,24.14 1.13,17.469 2.374,16.225 7.498,16.225 8.239,15.484 C10.1@8.239,14.267
"BAT 5S": LBAT.1 R15.1 R20.2 | length 13.8
  Top Layer w0.3: v1(8.763,3.175) 8.763,2.332 9.562,1.534 LBAT.1
  Top Layer w0.4: R15.1 4.611,8.724 7.293,6.042 7.293,5.257 8.763,3.787 v1(8.763,3.175)
  Bottom Layer w0.3: R20.2@6.575,3.302 R20.2 7.083,3.175 v1(8.763,3.175)
  other v2: 3.302,3.556
GND: C1.2 C2.1 C5.2 C6.1 C10.2 C11.2 D5.1 D10.1 J1.1 J1.7 J1.8 P?.1 Q3.3 Q4.3 R4.1 R8.1 R10.2 R11.2 R12.2 R13.2 R14.1 U1.3 U2.3 U3.2
  other v1: 15.17,32.131 16.279,32.131 8.382,35.306 28.756,38.36 29.866,38.36
  other v2: 35.833,3.556 3.302,36.556 35.833,36.556
IN_1: J1.4 LED1.1 P?.4 U1.1 | length 81.2
  Top Layer w0.2: J1.4 6.954,26.21 3.9,26.21 1.625,23.935 1.625,17.674 2.579,16.72 7.703,16.72 9.525,14.898 9.525,5.804 11.022,4.307 17.515,4.307 18.656,5.448 U1.1
  Top Layer w0.3: J1.4@6.954,26.21 8.097,26.21 9.451,27.564 9.451,29.431 10.628,30.608 10.628,34.8 11.886,36.058 14.71,36.058 16.51,37.858 P?.4
  Top Layer w0.4: U1.1 18.656,7.861 19.558,8.763 25.745,8.763 26.507,9.525 29.501,9.525 30.353,10.377 30.353,15.912 LED1.1
IN_2: J1.6 LED2.1 P?.6 U2.1 | length 74.1
  Top Layer w0.25: J1.6 6.954,24.21 3.194,24.21 2.54,23.556 2.54,18.053 2.958,17.635 7.166,17.635 8.669,19.139 9.525,19.139 ; LED2.1 9.525,20.41 9.525,19.139 ; U2.1 22.463,28.686 21.981,28.204 18.451,28.204 16.946,29.709 15.314,29.709 13.647,28.042 12.904,28.042 11.721,26.859 11.721,22.584 12.033,22.271 14.015,22.271 14.747,21.539 14.747,19.743 14.143,19.139 9.525,19.139
  Top Layer w0.3: J1.6@6.954,24.21 8.758,24.21 10.541,25.993 10.541,28.979 11.718,30.156 11.718,34.349 12.337,34.968 15.161,34.968 15.883,35.689 20.344,35.689 21.59,36.935 P?.6
NetC3_1: C3.1 C4.2 D3.2 U1.8 | length 9.9
  Top Layer w0.4: C3.1 C3.1@12.641,12.921 ; C4.2 13.458,13.738 C3.1@12.641,12.921 ; U1.8 18.085,12.921 D3.2 C3.1@12.641,12.921
NetC3_2: C3.2 C4.1 D4.1 Q1.3 Q3.2 R3.1 U1.6 | length 34.1
  Top Layer w0.4: C3.2 12.573,6.803 12.573,10.795 ; v1(15.875,14.257) 15.875,16.069 14.545,17.399 12.319,17.399 11.458,16.538 C4.1 10.668,15.21 10.668,11.398 11.271,10.795 12.573,10.795 ; R3.1@23.193,16.085 22.02,16.085 21.221,15.286 21.221,12.375 U1.6 21.196,11.29 20.701,10.795 12.573,10.795
  other v2: 35.306,14.859
NetC7_1: C7.1 C8.2 D8.2 U2.8 | length 11.3
  Top Layer w0.4: U2.8 24.026,25.111 D8.2 C7.1@28.477,24.54 ; C8.2 27.661,23.723 C7.1@28.477,24.54 ; C7.1@29.661,23.723 C7.1 C7.1@28.477,24.54
NetC7_2: C7.2 C8.1 D9.1 Q2.3 Q4.2 R7.1 U2.6 | length 30.1
  Top Layer w0.2: U2.6 19.923,25.751 20.674,26.502 25.76,26.502 28.661,29.403 C7.2
  Top Layer w0.4: R7.1@18.056,21.334 19.923,23.201 U2.6 ; C7.2 C7.2@28.954,30.48 ; C8.1 30.48,22.28 30.48,28.954 C7.2@28.954,30.48 ; v1(31.877,30.48) C7.2@28.954,30.48
  other v2: 35.306,25.4
NetC9_1: C9.1 R15.2 U3.3 | length 4.5
  Top Layer w0.3: U3.3 4.765,11.527 R15.2 6.315,8.877 C9.1
NetC9_2: C9.2 R16.2 U3.4 | length 3.6
  Top Layer w0.3: U3.4 6.349,12.227 C9.2 R16.2
NetC11_1: C11.1 J1.2 P?.2 R14.2 U3.1 | length 40.9
  Top Layer w0.2: C11.1@2.28,14.418 2.247,14.452 1.83,14.452 0.635,15.647 0.635,24.345 4.5,28.21 6.954,28.21 J1.2
  Top Layer w0.3: R14.2 2.48,10.427 1.19,11.717 1.19,13.479 1.997,14.285 C11.1 U3.1 ; J1.2 7.81,28.241 8.361,28.792 8.361,29.882 8.367,29.889 8.367,32.605 6.858,34.114 6.858,35.818 7.843,36.803 10.26,36.803 P?.2
NetD1_1: D1.1 D4.2 Q1.1 R1.2 R3.2 | length 11.4
  Top Layer w0.4: v1@15.621,18.161 v1(15.748,18.161) 16.862,18.161 R1.2 17.713,17.66 D1.1 21.196,17.66 21.221,17.635 D4.2 R3.2@23.193,17.635
  Bottom Layer w0.4: v1(15.748,18.161) 17.145,18.161 18.224,17.081 Q1.1@18.224,16.51
NetD1_2: D1.2 R1.1 U1.7 | length 4.7
  Top Layer w0.4: R1.1 17.951,15.785 D1.2 19.926,13.81 U1.7
NetD2_1: D2.1 D5.2 Q3.1 R2.2 R4.2 | length 13.9
  Top Layer w0.4: R4.2 16.293,1.209 17.752,1.209 R2.2 18.127,1.284 D5.2 21.577,1.284 D2.1 25.135,1.259 v1(27.432,3.556)
  Bottom Layer w0.4: v1(27.432,3.556) 28.639,3.556 Q3.1@28.702,3.619
NetD2_2: D2.2 R2.1 U1.4 | length 7
  Top Layer w0.4: R2.1 20.237,3.134 D2.2 22.466,5.363 U1.4
NetD6_1: D6.1 D9.2 Q2.1 R5.1 R7.2 | length 19.1
  Top Layer w0.4: v1(16.318,28.194) 16.318,20.766 17.333,19.751 18.374,19.751 18.424,19.801 D6.1 23.406,19.801 R5.1
  Bottom Layer w0.4: v1(16.318,28.194) 17.653,29.529 Q2.1@17.653,29.972 ; Q2.1@17.018,29.699 16.745,29.972 Q2.1@17.653,29.972 ; Q2.1@17.653,30.226 Q2.1@17.653,29.972 ; Q2.1 Q2.1@17.653,29.972
NetD6_2: D6.2 R5.2 U2.7 | length 4.7
  Top Layer w0.4: U2.7 21.193,23.651 D6.2 22.216,23.041 R5.2
NetD7_1: D7.1 D10.2 Q4.1 R6.1 R8.2 | length 17.3
  Top Layer w0.4: D10.2@12.851,34.032 15.097,34.032 D7.1@15.403,34.337 ; D7.1@15.413,34.327 D7.1@15.403,34.337 ; v1(25.654,36.703) 24.451,35.5 24.451,34.438 24.167,34.154 22.906,34.154 22.008,35.052 16.122,35.052 15.408,34.337 D7.1@15.403,34.337
  Bottom Layer w0.4: Q4.1@23.622,36.703 v1(25.654,36.703)
NetD7_2: D7.2 R6.2 U2.4 | length 6.1
  Top Layer w0.4: U2.4 18.653,34.327 R6.2@20.953,34.327
NetLBAT_2: LBAT.2 R11.1 | length 1.5
  Top Layer w0.3: LBAT.2 R11.1
NetLED1_2: LED1.2 R13.1 | length 1
  Top Layer w0.4: R13.1 LED1.2
NetLED2_2: LED2.2 R12.1 | length 1
  Top Layer w0.4: LED2.2 R12.1
NetLVCC_2: LVCC.2 R10.1 | length 1.6
  Top Layer w0.3: LVCC.2 R10.1
NetQ1_2: Q1.2 Q2.2 R16.1 R20.1 | length 9.5
  Top Layer w0.4: R16.1 7.938,8.873 7.938,5.524 v1(10.287,3.175) v1@10.01,3.175
  Bottom Layer w0.3: v1(10.287,3.175) R20.1@12.878,3.175
Vcc: C1.1 C2.2 C5.1 C6.2 D3.1 D8.1 J1.5 LVCC.1 P?.5 U1.5 U2.5 | length 127.4
  Top Layer w0.2: J1.5 6.954,25.21 3.529,25.21 2.07,23.751 2.07,17.859 2.764,17.165 7.41,17.165 8.914,18.669 14.337,18.669 15.217,19.549 15.217,22.407 C5.1
  Top Layer w0.3: J1.5 8.269,25.241 9.996,26.968 9.996,29.205 11.173,30.382 11.173,34.574 12.112,35.513 14.936,35.513 15.657,36.234 18.204,36.234 19.05,37.081 P?.5
  Top Layer w0.4: C5.1 12.913,26.502 15.55,29.139 16.709,29.139 18.214,27.634 24.451,27.634 D8.1 C6.2 25.878,29.859 26.67,30.651 26.67,32.156 27.317,32.803 28.575,32.803 ; C2.2 D3.1 16.991,10.15 21.567,10.15 22.466,11.049 U1.5 27.806,12.35 C1.1 25.831,15.125 25.831,17.399 27.663,19.231 30.619,19.231 31.242,19.854 31.242,28.889 31.756,29.403 32.578,29.403 33.274,30.099 33.274,31.75 32.221,32.803 28.575,32.803 ; U2.5 18.653,27.559 ; LVCC.1 28.575,34.569 28.575,32.803
pads on no net: C1.0 C5.0 J1.MP1 J1.MP2 Q1.0 Q2.0 Q3.0 Q4.0 R1.0 R2.0 R5.0 R6.0 R10.0 R11.0 R12.0 R13.0 U1.0 U1.2 U2.0 U2.2 U3.0

## Polygon pours and split planes (outlines as drawn)
GND on Bottom Layer "Bottom Layer-GND" (solid, pour order 28): -0.127,39.624 39.624,39.624 39.624,0 -0.127,0
no net on Bottom Layer "Bottom Layer-No Net 2" (solid, pour order 26): -6.223,39.37
NetC7_2 on Bottom Layer "Bottom Layer-NetC7_1" (solid, pour order 10): 14.859,20.987 15.526,20.32 37.632,20.32 37.973,20.661 37.973,30.425 36.648,31.75 23.083,31.75 18.511,27.178 15.478,27.178 14.859,26.559
NetC3_2 on Bottom Layer "Bottom Layer-NetC3_1" (solid, pour order 8): 14.986,10.414 17.145,8.255 37.084,8.255 37.973,9.144 37.973,19.447 37.608,19.812 21.206,19.812 20.32,18.926 20.32,16.002 19.24,14.922 15.43,14.922 14.986,14.478
no net on Bottom Layer "Bottom Layer-No Net" (solid, pour order 6): -4.191,35.052
NetQ1_2 on Bottom Layer "Bottom Layer-NetQ1_2" (solid, pour order 4): 12.446,31.496 12.446,9.525 16.891,5.08 16.891,0.381 10.795,0.381 10.795,4.191 8.509,6.477 0,6.477 0,33.401 10.541,33.401
"BAT 5S" on Bottom Layer "Bottom Layer-BAT 5S" (solid, pour order 2): 0,6.096 8.128,6.096 8.128,0.381 0,0.381
no net on Bottom Layer "Bottom Layer-No Net 1" (solid, pour order 0): -2.667,33.147
GND on Top Layer "Top Layer-GND" (solid, pour order 30): 0,39.624 39.624,39.624 39.624,0 0,0 0,39.624

## Keep-outs
Top Layer:
  the board outline again, w0.254
Bottom Layer:
  lines w0.254: -0.127,0 -0.127,39.624 39.624,39.624 39.624,0 -0.127,0

## Silkscreen, mask and mechanical layers (free items; w line width, h text height)
Top Overlay:
  text "GND" at 5.588,33.921 h1.52
  text "GND" at 34.417,32.512 h1.52
  text "M+" at 34.646,21.336 h1.52
  text "M-" at 34.798,18.034 h1.52
  text "GND" at 34.417,6.477 h1.52
Bottom Overlay:
  text "_____" at 22.225,36.068 h2
  text "____" at 17.526,35.56 h2
  text "___" at 20.828,35.052 h2
  text "Morpheus V7" at 16.891,34.671 h2
Mechanical 16:
  the board outline again, w0.254